# Altium PCB PCB1.PcbDoc
Units mm, origin at the board's own origin, x right, y up, seen from the top; angles counter-clockwise.
Board outline 45 x 30 mm, 2 copper layers (Top Layer, Bottom Layer); 11 components, 11 nets, 24 pads, 0 vias.
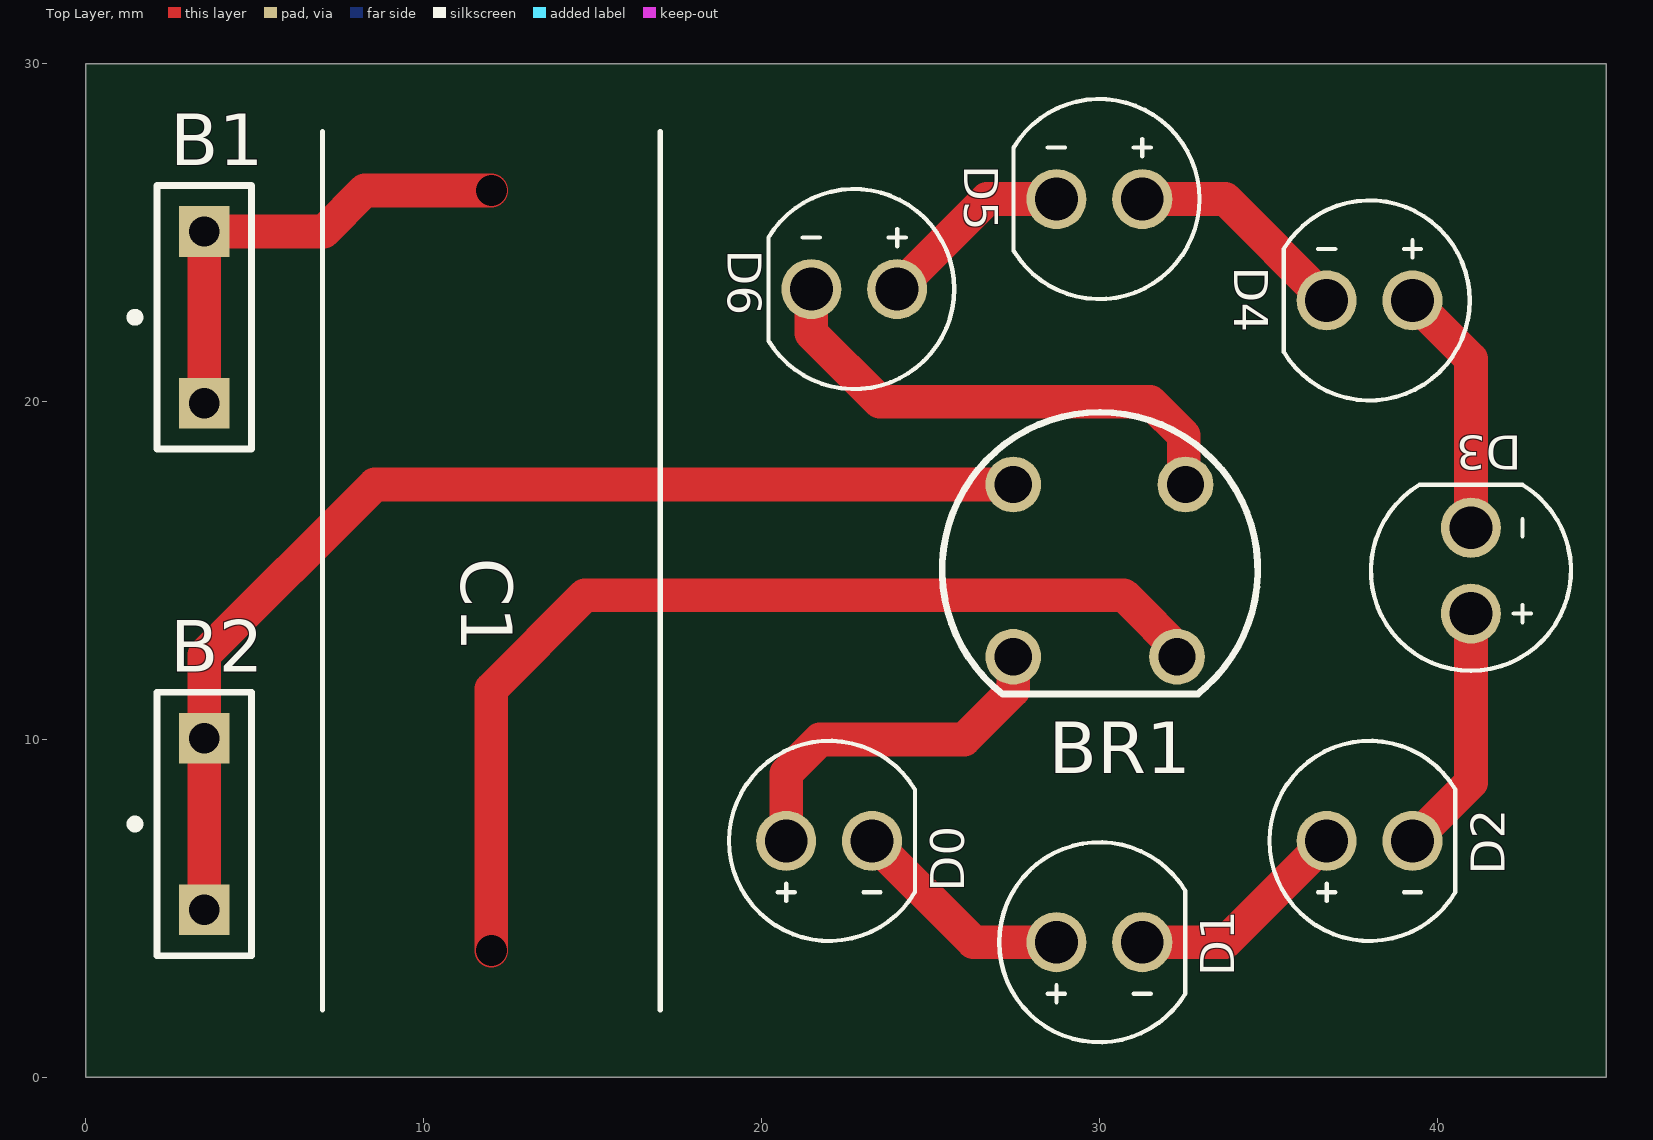
[diagram p0: Top Layer view]
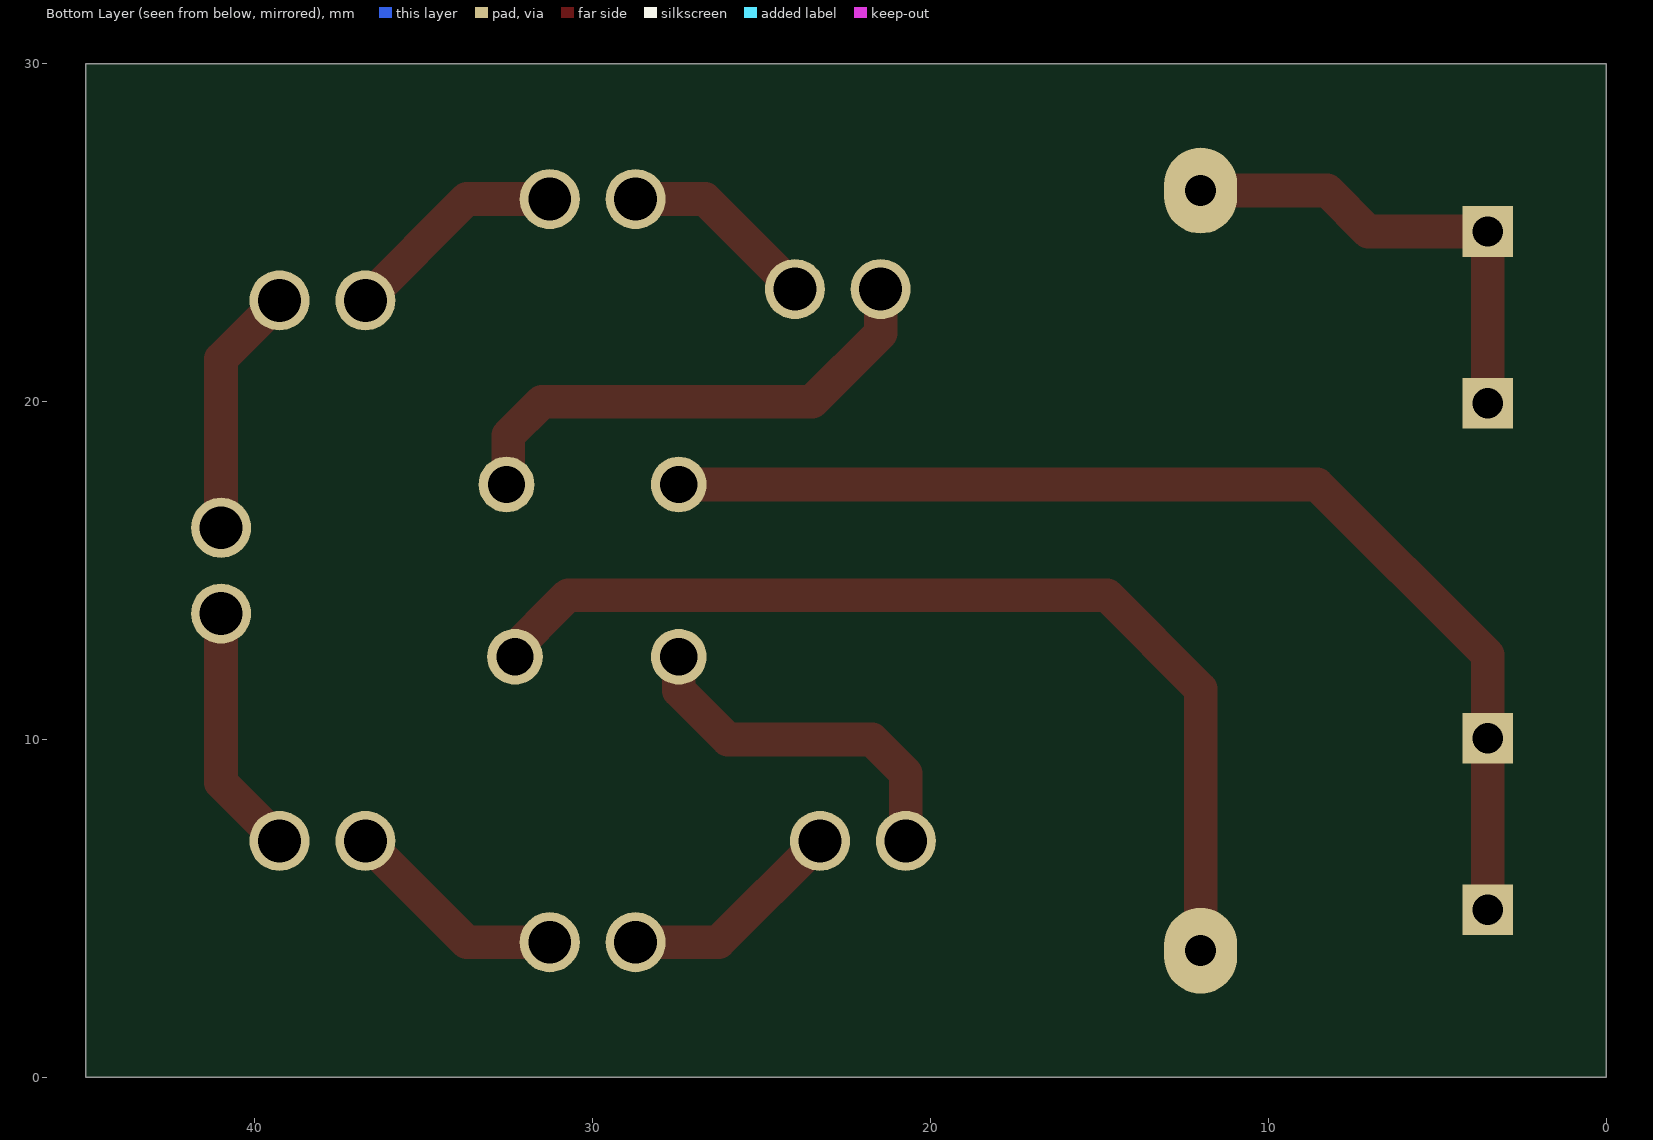
[diagram p1: Bottom Layer view, seen from below]
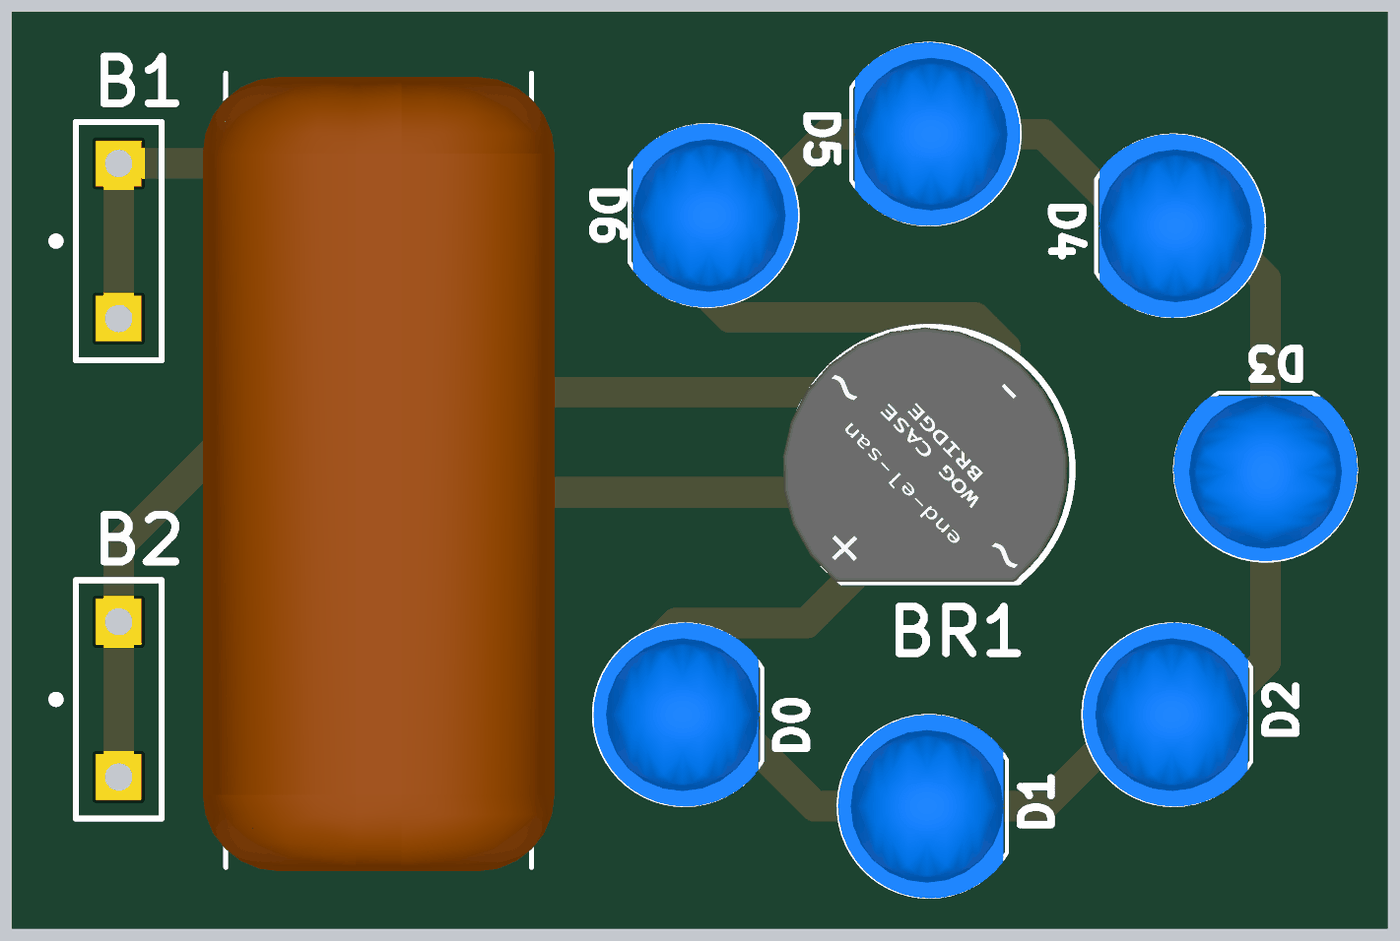
[diagram p2: 3D render of the assembled board from above, using the file's embedded part models]

## Layer stack, top to bottom
Top Solder: solder mask 0.0102, Solder Resist, Dk 3.5
Top Layer: signal copper 0.0356
Dielectric 1: dielectric 0.32, FR-4, Dk 4.8
Bottom Layer: signal copper 0.0356
Bottom Solder: solder mask 0.0102, Solder Resist, Dk 3.5

## Board outline
0,0 45,0 45,30 0,30

## Design rules (kind name [scope] priority, off if disabled: settings)
Clearance [All] p1: gap=0.5
PolygonConnect [All] p1: connectstyle=Relief reliefconductorwidth=0.254 reliefentries=4 polygonreliefangle="90 Angle" airgapwidth=0.254
RoutingVias [All] p1: holewidth=0.711 width=1.27 viastyle="Through Hole" minholewidth=0.711 minwidth=1.27 maxholewidth=0.711 maxwidth=1.27
SolderMaskExpansion [All] p1: expansion=0.102
Width [All] p1: maxlimit=1 minlimit=0.254 preferedwidth=1
30 further rules are at their usual default settings.

## Components (designator, comment, footprint, x,y, rotation, side; value= is the part's Value field where it differs from the comment)
B1 "Socket" PIN1 3.5,22.5 r90 top
B2 "Socket" PIN1 3.5,7.5 r90 top
BR1 "W02G-E4/51" DIOB_W02G-E4/51 30,15 r180 top
C1 "470n" CAPR7.62-6.8X2.5 12,15 r270 top
D0 "LED0" LED-0 22,7 r180 top
D1 "LED0" LED-0 30,4 r180 top
D2 "LED0" LED-0 38,7 r180 top
D3 "LED0" LED-0 41,15 r270 top
D4 "LED0" LED-0 38,23 r0 top
D5 "LED0" LED-0 30,26 r0 top
D6 "LED0" LED-0 22.743,23.336 r0 top

## Footprints (in the part's own frame and the unit in brackets; to place one, negate y for a bottom-side part, rotate by r counter-clockwise, add the part's x,y. Pads: shape width x height; smd on the part's side, far side on the other; paste and mask are expansions set on the pad)
CAPR7.62-6.8X2.5 [mm] "Capacitor, MF, Thru-Hole, Dipped Radial; Body 6.8 x 2.5 mm (WxT) Pin Spacing 7.62 mm (typ)"
  round 0 / inner round 0 / far side oval 2.54x2.159 hole 0.914 unplated: 1(-11.25,0) 2(11.25,0)
  silkscreen extent -13,-5 13,5, body extent -12.87,-5.75 13.13,5.75, height 22
DIOB_W02G-E4/51 [mm]
  round 1.65 hole 1.1: 1(-2.3,2.55) 2(2.55,2.55) 3(2.55,-2.55) 4(-2.55,-2.55)
  silkscreen extent -4.69,-4.69 4.65,3.66, body extent -4.55,-4.67 4.8,3.65, height 4.83
LED-0 [mil] "LED; 2 Leads"
  round 70 hole 50: 1(50,0) 2(-50,0)
  silkscreen extent -100,-117 117,117, body extent -96,-118 117,118, height 345
PIN1 [mm]
  rect 1.5x1.5 hole 0.9: 1(-2.54,0) 1(2.54,0)
  silkscreen extent -3.9,-1.4 3.9,2.17

## Part data
BR1: "Diode Rectifier Bridge Single 200V 1.5A 4-Pin Case WOG Bulk"
C1: library part CAPMF_470n_100V_MK, "Capacitor THD MK Film 470nF 10% 100V"
D0 D1 D2 D3 D4 D5 D6: "Typical INFRARED GaAs LED"

## Nets (pads, with @x,y where several pads share a name; then routed paths per layer and width w, separated by ;. In a path a pad name is that pad's centre, name@x,y a point inside that pad or via, vN(x,y) a via of type N, cw(c..) or ccw(c..) an arc to the next point about the centre after c; other vN are vias at no path point)
NetB1_1: B1.1 C1.1 | length 14.1
  Top Layer w1: B1.1@3.5,19.96 3.5,25.04 7.04,25.04 8.25,26.25 C1.1
NetB2_1: B2.1 BR1.3 | length 33.6
  Top Layer w1: B2.1@3.5,4.96 3.5,10.04 3.5,12.5 8.55,17.55 BR1.3
NetBR1_1: BR1.1 C1.2 | length 30.2
  Top Layer w1: C1.2 12,11.5 14.775,14.275 30.725,14.275 BR1.1@32.55,12.45
NetBR1_2: BR1.2 D0.1 | length 10.7
  Top Layer w1: D0.1 20.73,9 21.73,10 26,10 27.45,11.45 BR1.2
NetBR1_4: BR1.4 D6.2 | length 15.1
  Top Layer w1: D6.2 21.473,22.027 23.5,20 31.5,20 32.5,19 32.5,17.6 BR1.4
NetD0_2: D0.2 D1.1 | length 6.7
  Top Layer w1: D0.2 26.27,4 D1.1
NetD1_2: D1.2 D2.1 | length 6.7
  Top Layer w1: D1.2 33.73,4 D2.1
NetD2_2: D2.2 D3.1 | length 7.4
  Top Layer w1: D2.2 41,8.73 D3.1
NetD3_2: D3.2 D4.1 | length 7.4
  Top Layer w1: D4.1 41,21.27 D3.2
NetD4_2: D4.2 D5.1 | length 6.7
  Top Layer w1: D5.1 33.73,26 D4.2
NetD5_2: D5.2 D6.1 | length 5.8
  Top Layer w1: D6.1 26.677,26 D5.2

## Silkscreen, mask and mechanical layers (free items; w line width, h text height)
Mechanical 1:
  the board outline again, w0.5